# Altium PCB LPCB221R0.PcbDoc (part 1 of 2)
Units mm, origin at the board's own origin, x right, y up, seen from the top; angles counter-clockwise.
Board outline 145 x 164.7 mm, 2 copper layers (Top Layer, Bottom Layer); 95 components, 92 nets, 422 pads, 91 vias.
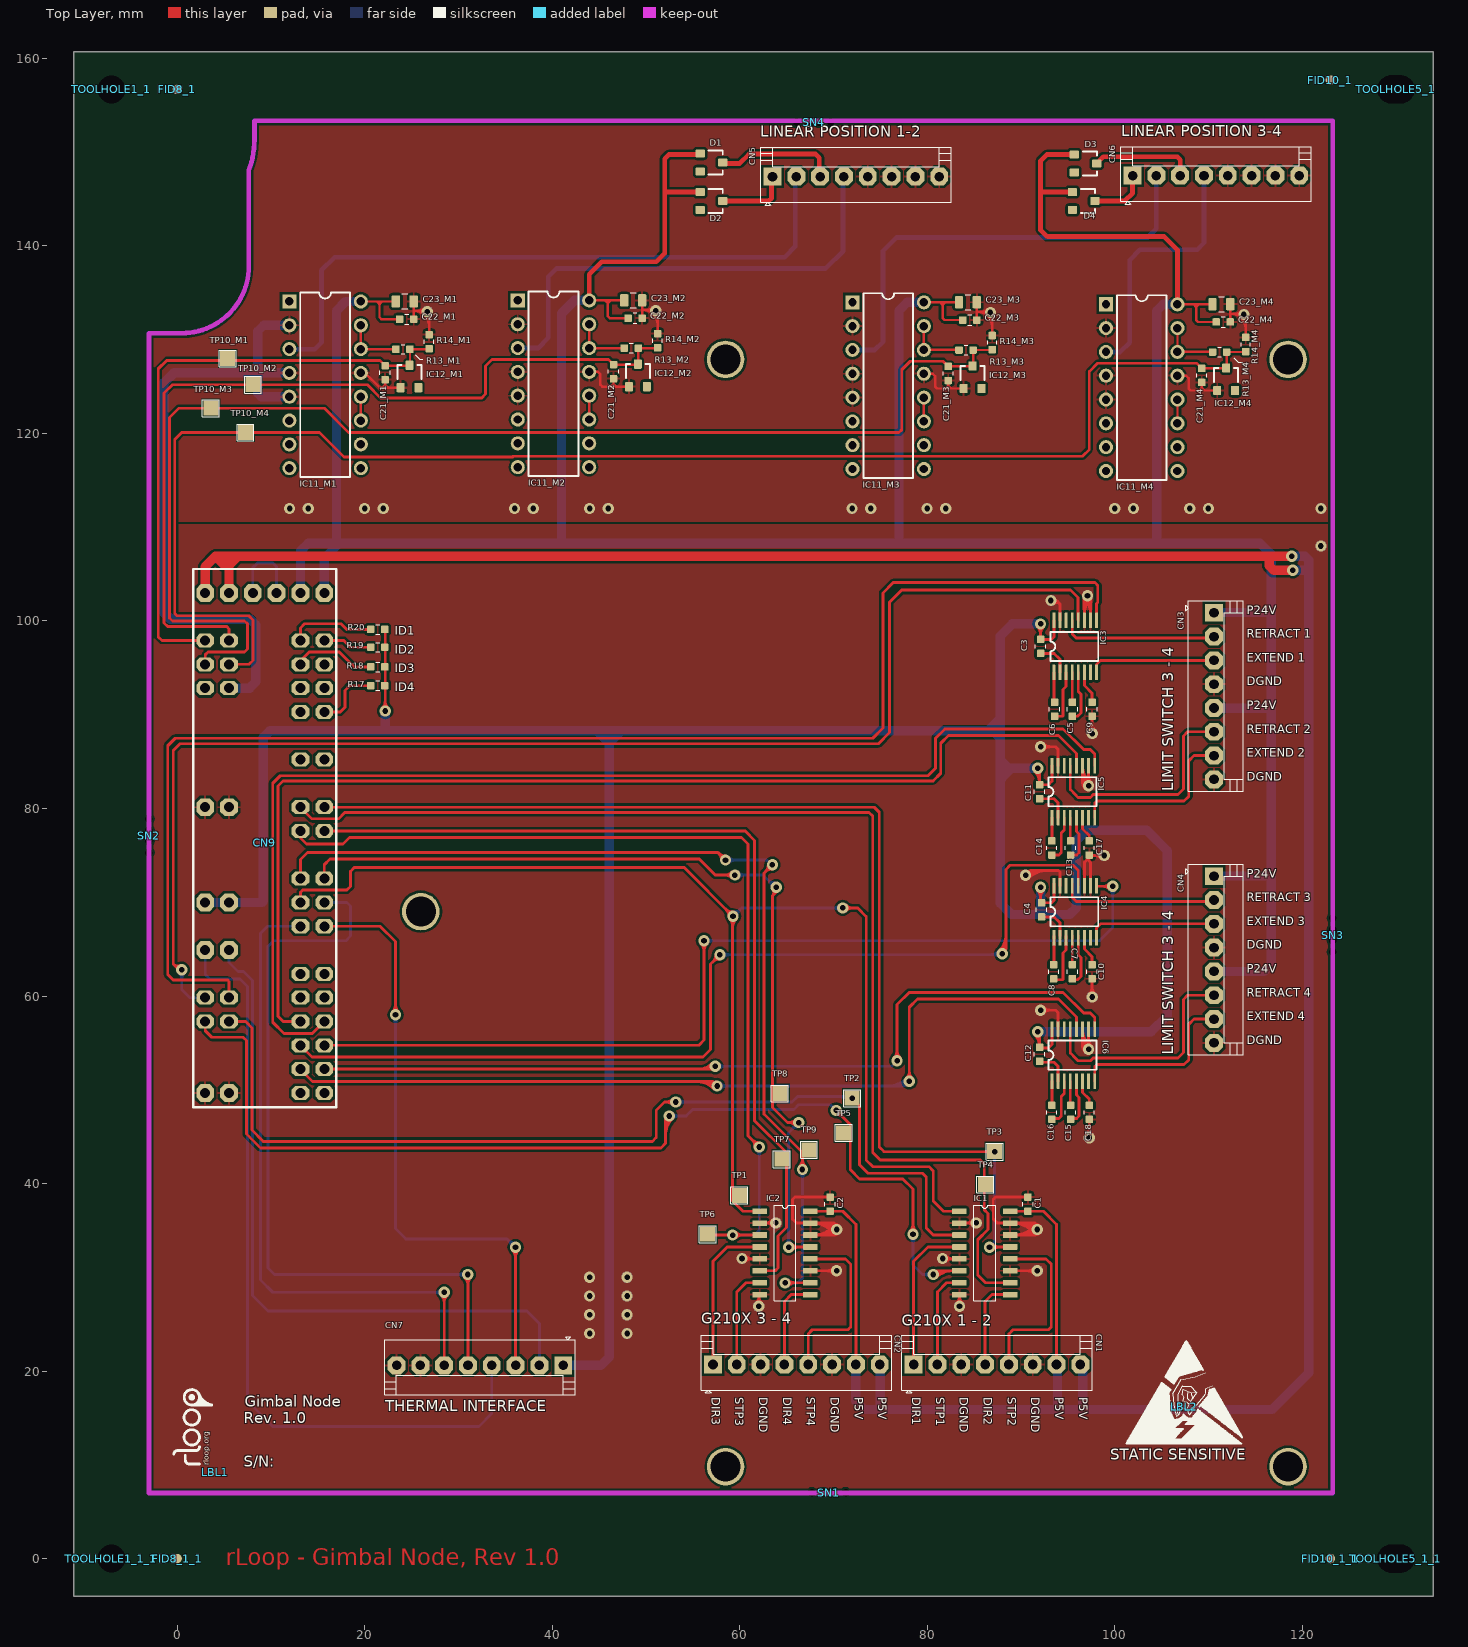
[diagram p0: Top Layer view]
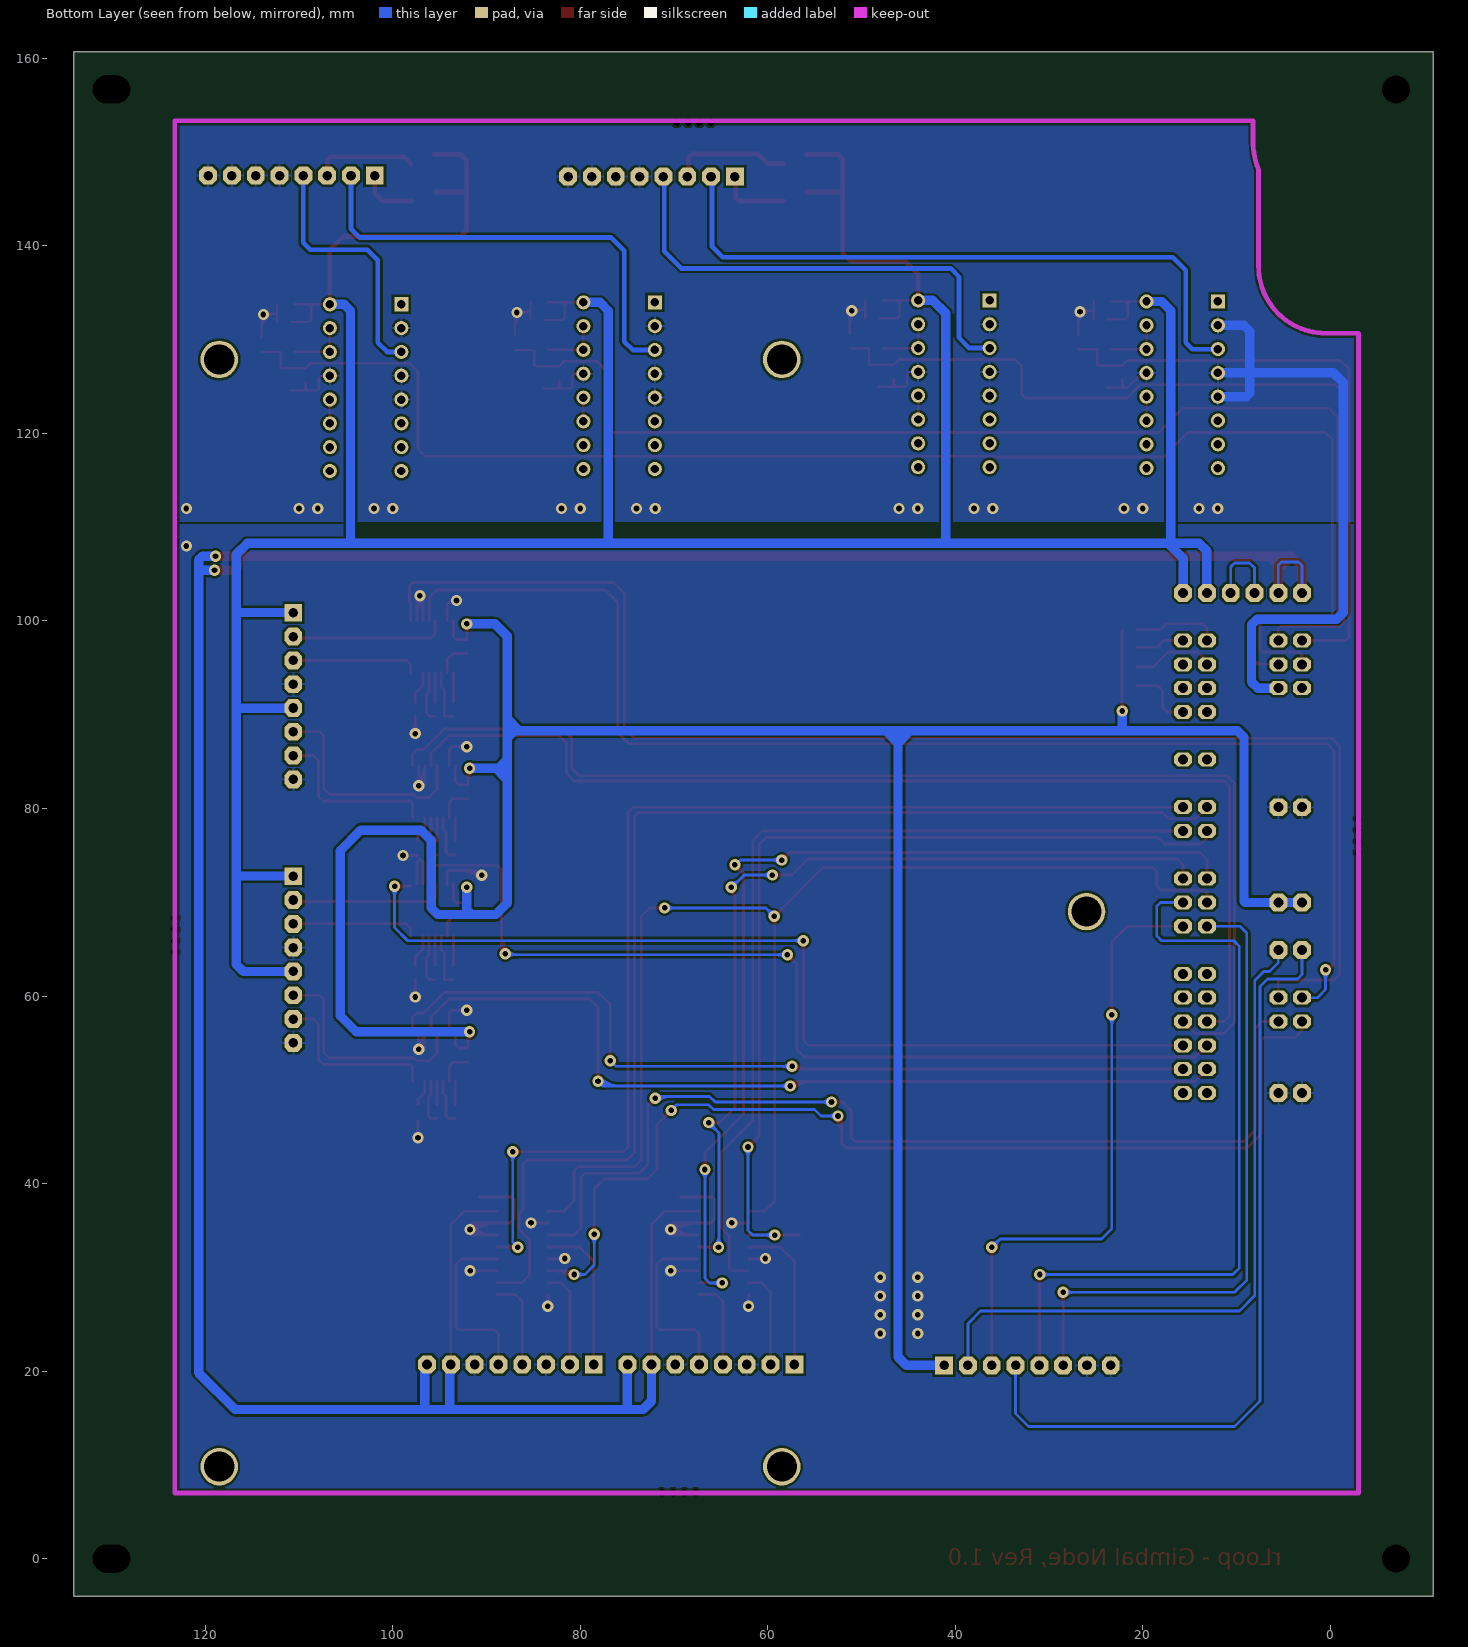
[diagram p1: Bottom Layer view, seen from below]

## Layer stack, top to bottom
Top Layer: signal copper 0.0356
Dielectric: core 0.32, FR-4, Dk 4.8
Bottom Layer: signal copper 0.0356

## Board outline
-11,-4 -11,160.695 134,160.695 134,-4

## Design rules (kind name [scope] priority, off if disabled: settings)
Clearance [All] p1: gap=0.254
HoleSize [All] p1: absolutevalues=TRUE maxlimit=5 minlimit=0.025 maxpercent=80.000 minpercent=20.000
MinimumSolderMaskSliver [All] p1: minsoldermaskwidth=0.01
PolygonConnect [isVia] p1: connectstyle=Direct reliefconductorwidth=0.254 reliefentries=4 polygonreliefangle="90 Angle" airgapwidth=0.254
PolygonConnect PolygonConnect_1 [All] p2: connectstyle=Relief reliefconductorwidth=0.254 reliefentries=4 polygonreliefangle="90 Angle" airgapwidth=0.254
RoomDefinition "LPCB221 - OVERVIEW" [InComponentClass('LPCB221 - OVERVIEW')] p1: confinementstyle=ConfineIn formatcopy=TRUE lockcomponents=FALSE outline -79.611,-127.179 -28.811,-127.179 -28.811,-101.779 -79.611,-101.779
RoomDefinition "U_LPCB221 - CORE INTERFACE" [InComponentClass('U_LPCB221 - CORE INTERFACE')] p2: confinementstyle=ConfineIn formatcopy=TRUE lockcomponents=FALSE outline -79.611,-127.179 -28.811,-127.179 -28.811,-101.779 -79.611,-101.779
RoomDefinition M4 [InComponentClass('M4')] p3: confinementstyle=ConfineIn formatcopy=TRUE lockcomponents=FALSE outline 94.29,110.79 121.84,110.79 121.84,136.19 94.29,136.19
RoomDefinition M3 [InComponentClass('M3')] p4: confinementstyle=ConfineIn formatcopy=TRUE lockcomponents=FALSE outline 67.25,111 94.8,111 94.8,136.4 67.25,136.4
RoomDefinition M2 [InComponentClass('M2')] p5: confinementstyle=ConfineIn formatcopy=TRUE lockcomponents=FALSE outline 31.55,111.2 59.1,111.2 59.1,136.6 31.55,136.6
RoomDefinition M1 [InComponentClass('M1')] p6: confinementstyle=ConfineIn formatcopy=TRUE lockcomponents=FALSE outline 7.19,111.09 31.64,111.09 31.64,136.49 7.19,136.49
RoomDefinition "U_LPCB221 - LIMIT SWITCHES" [InComponentClass('U_LPCB221 - LIMIT SWITCHES')] p7: confinementstyle=ConfineIn formatcopy=TRUE lockcomponents=FALSE outline 87.1,43.69 117.9,43.69 117.9,104.79 87.1,104.79
RoomDefinition "U_LPCB221 - G210X INTERFACE" [InComponentClass('U_LPCB221 - G210X INTERFACE')] p8: confinementstyle=ConfineIn formatcopy=TRUE lockcomponents=FALSE outline 53.95,15.297 100.15,15.297 100.15,40.2 53.95,40.2
RoutingVias [All] p1: holewidth=0.6 width=1.2 viastyle="Through Hole" minholewidth=0.6 minwidth=1.2 maxholewidth=1.5 maxwidth=3
SilkToSilkClearance [All] p1 off: silktosilkclearance=0.01
SilkToSolderMaskClearance [IsPad] p1: minsilkscreentomaskgap=0.01 clearancetoexposedcopper=TRUE
SolderMaskExpansion [All] p1: expansion=0.102
Width [All] p1: maxlimit=1 minlimit=0.254 preferedwidth=0.3
24 further rules are at their usual default settings.

## Classes and differential pairs
component class "U_LPCB221 - CORE INTERFACE": CN7 CN9 R17 R18 R19 R20
component class "U_LPCB221 - LIMIT SWITCHES": C3 C4 C5 C6 C7 C8 C9 C10 C11 C12 C13 C14 C15 C16 C17 C18 CN3 CN4 IC3 IC4 IC5 IC6
component class "U_LPCB221 - G210X INTERFACE": C1 C2 CN1 CN2 IC1 IC2 TP1 TP2 TP3 TP4 TP5 TP6 TP7 TP8 TP9
component class "LPCB221 - OVERVIEW": LBL1 LBL2 SN1 SN2 SN3 SN4
component class M1: C21_M1 C22_M1 C23_M1 IC11_M1 IC12_M1 R13_M1 R14_M1 TP10_M1
component class M2: C21_M2 C22_M2 C23_M2 IC11_M2 IC12_M2 R13_M2 R14_M2 TP10_M2
component class M3: C21_M3 C22_M3 C23_M3 IC11_M3 IC12_M3 R13_M3 R14_M3 TP10_M3
component class M4: C21_M4 C22_M4 C23_M4 IC11_M4 IC12_M4 R13_M4 R14_M4 TP10_M4
net class MA420IN[1..4]: MA420IN1 MA420IN2 MA420IN3 MA420IN4
net class MLP_OUT[1..4]: MLP_OUT1 MLP_OUT2 MLP_OUT3 MLP_OUT4
channel class "LPCB221 - MLP CHANNEL": M1 M2 M3 M4

## Components (designator, comment, footprint, x,y, rotation, side; value= is the part's Value field where it differs from the comment)
C1 "100n / 50V / 10% / SMD 0603" LFP011__CC1608-0603-IPC7351_B 90.75,37.8 r90 top
C2 "100n / 50V / 10% / SMD 0603" LFP011__CC1608-0603-IPC7351_B 69.65,37.8 r90 top
C3 "100n / 50V / 10% / SMD 0603" LFP011__CC1608-0603-IPC7351_B 92.1,97.29 r270 top
C4 "100n / 50V / 10% / SMD 0603" LFP011__CC1608-0603-IPC7351_B 92.2,69.19 r270 top
C5 "100n / 50V / 10% / SMD 0603" LFP011__CC1608-0603-IPC7351_B 95.5,90.59 r270 top
C6 "100n / 50V / 10% / SMD 0603" LFP011__CC1608-0603-IPC7351_B 93.6,90.59 r270 top
C7 "100n / 50V / 10% / SMD 0603" LFP011__CC1608-0603-IPC7351_B 95.5,62.6 r270 top
C8 "100n / 50V / 10% / SMD 0603" LFP011__CC1608-0603-IPC7351_B 93.5,62.59 r270 top
C9 "100n / 50V / 10% / SMD 0603" LFP011__CC1608-0603-IPC7351_B 97.6,90.59 r270 top
C10 "100n / 50V / 10% / SMD 0603" LFP011__CC1608-0603-IPC7351_B 97.6,62.59 r270 top
C11 "100n / 50V / 10% / SMD 0603" LFP011__CC1608-0603-IPC7351_B 92,81.79 r270 top
C12 "100n / 50V / 10% / SMD 0603" LFP011__CC1608-0603-IPC7351_B 92,53.79 r270 top
C13 "100n / 50V / 10% / SMD 0603" LFP011__CC1608-0603-IPC7351_B 95.3,75.79 r270 top
C14 "100n / 50V / 10% / SMD 0603" LFP011__CC1608-0603-IPC7351_B 93.3,75.79 r270 top
C15 "100n / 50V / 10% / SMD 0603" LFP011__CC1608-0603-IPC7351_B 95.3,47.59 r270 top
C16 "100n / 50V / 10% / SMD 0603" LFP011__CC1608-0603-IPC7351_B 93.3,47.59 r270 top
C17 "100n / 50V / 10% / SMD 0603" LFP011__CC1608-0603-IPC7351_B 97.3,75.79 r270 top
C18 "100n / 50V / 10% / SMD 0603" LFP011__CC1608-0603-IPC7351_B 97.3,47.59 r270 top
C21_M1 "10pF / 50V / 5% / SMD 0603" LFP011__CC1608-0603-IPC7351_B 22.19,126.49 r270 top (schematic designator C21)
C21_M2 "10pF / 50V / 5% / SMD 0603" LFP011__CC1608-0603-IPC7351_B 46.55,126.6 r270 top (schematic designator C21)
C21_M3 "10pF / 50V / 5% / SMD 0603" LFP011__CC1608-0603-IPC7351_B 82.25,126.4 r270 top (schematic designator C21)
C21_M4 "10pF / 50V / 5% / SMD 0603" LFP011__CC1608-0603-IPC7351_B 109.29,126.19 r270 top (schematic designator C21)
C22_M1 "100n / 50V / 10% / SMD 0603" LFP011__CC1608-0603-IPC7351_B 24.49,132.19 r0 top (schematic designator C22)
C22_M2 "100n / 50V / 10% / SMD 0603" LFP011__CC1608-0603-IPC7351_B 48.85,132.3 r0 top (schematic designator C22)
C22_M3 "100n / 50V / 10% / SMD 0603" LFP011__CC1608-0603-IPC7351_B 84.55,132.1 r0 top (schematic designator C22)
C22_M4 "100n / 50V / 10% / SMD 0603" LFP011__CC1608-0603-IPC7351_B 111.59,131.89 r0 top (schematic designator C22)
C23_M1 "1uF / 50V / 10% / SMD 0805" LFP010__CC2012-0805-IPC7351_B 24.29,134.09 r0 top (schematic designator C23)
C23_M2 "1uF / 50V / 10% / SMD 0805" LFP010__CC2012-0805-IPC7351_B 48.65,134.2 r0 top (schematic designator C23)
C23_M3 "1uF / 50V / 10% / SMD 0805" LFP010__CC2012-0805-IPC7351_B 84.35,134 r0 top (schematic designator C23)
C23_M4 "1uF / 50V / 10% / SMD 0805" LFP010__CC2012-0805-IPC7351_B 111.39,133.79 r0 top (schematic designator C23)
CN1 "640456-8" 640456-8 87.45,20.7 r0 top
CN2 "640456-8" 640456-8 66.05,20.7 r0 top
CN3 "640456-8" 640456-8 110.6,91.99 r270 top
CN4 "640456-8" 640456-8 110.6,63.89 r270 top
CN5 "640456-8" 640456-8 72.4,147.4 r0 top
CN6 "640456-8" 640456-8 110.8,147.5 r0 top
CN7 "640456-8" 640456-8 32.3,20.6 r180 top locked
CN9 "RLOOP_NODE_CORE" RLOOP_NODE_CORE 3,103 r270 top locked
D1 "BAS16" LFP021__SOT23 57,148.9 r270 top
D2 "BAS16" LFP021__SOT23 57,144.8 r270 top
D3 "BAS16" LFP021__SOT23 96.9,148.8 r270 top
D4 "BAS16" LFP021__SOT23 96.7,144.8 r270 top
FID8_1 "FIDUCIAL" FIDTOP 0,156.695 r0 top
FID8_1_1 "FIDUCIAL" FIDTOP 0,0 r0 top
FID10_1 "FIDUCIAL" FIDTOP 123,157.695 r0 top
FID10_1_1 "FIDUCIAL" FIDTOP 123,0 r0 top
IC1 "SN74HCT157DR" LFP079__SOP16 86.15,32.6 r270 top
IC2 "SN74HCT157DR" LFP079__SOP16 64.85,32.6 r270 top
IC3 "MAX3232CPWR" LFP049__TSSOP-16 95.8,97.29 r0 top
IC4 "MAX3232CPWR" LFP049__TSSOP-16 95.8,68.99 r0 top
IC5 "MAX3232CPWR" LFP049__TSSOP-16 95.6,81.79 r0 top
IC6 "MAX3232CPWR" LFP049__TSSOP-16 95.6,53.69 r0 top
IC11_M1 "RCV420JP" DIP-P16/X1.5 15.79,125.19 r270 top (schematic designator IC11)
IC11_M2 "RCV420JP" DIP-P16/X1.5 40.15,125.3 r270 top (schematic designator IC11)
IC11_M3 "RCV420JP" DIP-P16/X1.5 75.85,125.1 r270 top (schematic designator IC11)
IC11_M4 "RCV420JP" DIP-P16/X1.5 102.89,124.89 r270 top (schematic designator IC11)
IC12_M1 "BZX84C3V6LT1G" LFP021__SOT23 24.79,126.09 r0 top (schematic designator IC12)
IC12_M2 "BZX84C3V6LT1G" LFP021__SOT23 49.15,126.2 r0 top (schematic designator IC12)
IC12_M3 "BZX84C3V6LT1G" LFP021__SOT23 84.85,126 r0 top (schematic designator IC12)
IC12_M4 "BZX84C3V6LT1G" LFP021__SOT23 111.89,125.79 r0 top (schematic designator IC12)
LBL1 "RLOOP_LOGO" RLOOP_LOGO 4.1,9.2 r90 top
LBL2 "STATIC LABEL" STATIC_LABEL 107.4,16.2 r0 top
R13_M1 "1.78K / 0.1W / 1% / 50V / SMD 0603" LFP020__CR1608-0603-IPC7351_B 24.09,128.99 r180 top (schematic designator R13)
R13_M2 "1.78K / 0.1W / 1% / 50V / SMD 0603" LFP020__CR1608-0603-IPC7351_B 48.45,129.1 r180 top (schematic designator R13)
R13_M3 "1.78K / 0.1W / 1% / 50V / SMD 0603" LFP020__CR1608-0603-IPC7351_B 84.15,128.9 r180 top (schematic designator R13)
R13_M4 "1.78K / 0.1W / 1% / 50V / SMD 0603" LFP020__CR1608-0603-IPC7351_B 111.19,128.69 r180 top (schematic designator R13)
R14_M1 "3.3K / 0.1W / 1% / SMD 0603" LFP020__CR1608-0603-IPC7351_B 26.89,129.79 r270 top (schematic designator R14)
R14_M2 "3.3K / 0.1W / 1% / SMD 0603" LFP020__CR1608-0603-IPC7351_B 51.25,129.9 r270 top (schematic designator R14)
R14_M3 "3.3K / 0.1W / 1% / SMD 0603" LFP020__CR1608-0603-IPC7351_B 86.95,129.7 r270 top (schematic designator R14)
R14_M4 "3.3K / 0.1W / 1% / SMD 0603" LFP020__CR1608-0603-IPC7351_B 113.99,129.49 r270 top (schematic designator R14)
R17 "0R / 0.1W / SMD 0603" LFP020__CR1608-0603-IPC7351_B 21.4,93.1 r0 top
R18 "0R / 0.1W / SMD 0603" LFP020__CR1608-0603-IPC7351_B 21.4,95.1 r0 top
R19 "0R / 0.1W / SMD 0603" LFP020__CR1608-0603-IPC7351_B 21.4,97.2 r0 top
R20 "0R / 0.1W / SMD 0603" LFP020__CR1608-0603-IPC7351_B 21.4,99.1 r0 top
SN1 "PCB_SNAPOUT" SNAPOUT_NEW 71.3,7 r180 top
SN2 "PCB_SNAPOUT" SNAPOUT_NEW -3,75.3 r90 top
SN3 "PCB_SNAPOUT" SNAPOUT_NEW 123.252,64.7 r90 top
SN4 "PCB_SNAPOUT" SNAPOUT_NEW 69.7,153.2 r180 top
TOOLHOLE1_1 "Comment" TOOL-1#1 -7,156.695 r0 top
TOOLHOLE1_1_1 "Comment" TOOL-1#1 -7,0 r0 top
TOOLHOLE5_1 "Comment" TOOL-1#2 130,156.695 r0 top
TOOLHOLE5_1_1 "Comment" TOOL-1#2 130,0 r0 top
TP1 "SMD_TP" SMD-TP 59.97,38.742 r0 top
TP2 "SMD_TP" SMD-TP 72,49.1 r0 top
TP3 "SMD_TP" SMD-TP 87.2,43.4 r0 top
TP4 "SMD_TP" SMD-TP 86.2,39.9 r0 top
TP5 "SMD_TP" SMD-TP 71.1,45.4 r0 top
TP6 "SMD_TP" SMD-TP 56.6,34.6 r0 top
TP7 "SMD_TP" SMD-TP 64.5,42.6 r0 top
TP8 "SMD_TP" SMD-TP 64.3,49.6 r0 top
TP9 "SMD_TP" SMD-TP 67.4,43.6 r0 top
TP10_M1 "SMD_TP" SMD-TP 5.4,128 r90 top (schematic designator TP10)
TP10_M2 "SMD_TP" SMD-TP 8.1,125.2 r90 top (schematic designator TP10)
TP10_M3 "SMD_TP" SMD-TP 3.6,122.7 r90 top (schematic designator TP10)
TP10_M4 "SMD_TP" SMD-TP 7.3,120.1 r90 top (schematic designator TP10)

## Footprints (in the part's own frame and the unit in brackets; to place one, negate y for a bottom-side part, rotate by r counter-clockwise, add the part's x,y. Pads: shape width x height; smd on the part's side, far side on the other; paste and mask are expansions set on the pad)
640456-8 [mm] "Connector, Male Header, 8 Way"
  rect 1.905x1.905 hole 1.02: 1(-8.89,0)
  oct 1.905x1.905 hole 1.02: 2(-6.35,0) 3(-3.81,0) 4(-1.27,0) 5(1.27,0) 6(3.81,0) 7(6.35,0) 8(8.89,0)
  silkscreen extent -10.15,-3.04 10.17,3.1
DIP-P16/X1.5 [mm] "16Pin DIP"
  rect 1.5x1.5 hole 0.9: 1(-8.89,-3.81)
  round 1.5 hole 0.9: 2(-6.35,-3.81) 3(-3.81,-3.81) 4(-1.27,-3.81) 5(1.27,-3.81) 6(3.81,-3.81) 7(6.35,-3.81) 8(8.89,-3.81) 9(8.89,3.81) 10(6.35,3.81) 11(3.81,3.81) 12(1.27,3.81) 13(-1.27,3.81) 14(-3.81,3.81) 15(-6.35,3.81) 16(-8.89,3.81)
  silkscreen extent -9.85,-2.65 9.85,2.65
FIDTOP [mil]
  round 40 smd mask+39.37: 1(0,0)
LFP010__CC2012-0805-IPC7351_B [mm]
  rrect25% 0.9x1.3 smd paste-0.01: 1(-0.95,0) 2(0.95,0)
  silkscreen extent -0.3,-0.8 0.3,0.8
LFP011__CC1608-0603-IPC7351_B [mm]
  rrect25% 0.8x0.8 smd: 1(-0.75,0) 2(0.75,0)
  silkscreen extent -0.2,-0.55 0.2,0.55
LFP020__CR1608-0603-IPC7351_B [mm]
  rrect25% 0.8x0.8 smd: 1(-0.75,0) 2(0.75,0)
  silkscreen extent -0.2,-0.5 0.2,0.5
LFP021__SOT23 [mm] "SOT-23; 3 Leads; Body 3.0 x 2.5 mm, inc. leads (LxW max)"
  rrect25% 0.85x1 smd paste-0.05: 1(-0.95,-1.2) 2(0.95,-1.2) 3(0,1.2)
  silkscreen extent -1.27,-0.3 1.28,1.2
LFP049__TSSOP-16 [mm] "Copied from 984E-02"
  rrect25% 0.3x1.65 smd paste-0.03: 1(-2.275,-2.775) 2(-1.625,-2.775) 3(-0.975,-2.775) 4(-0.325,-2.775) 5(0.325,-2.775) 6(0.975,-2.775) 7(1.625,-2.775) 8(2.275,-2.775) 9(2.275,2.775) 10(1.625,2.775) 11(0.975,2.775) 12(0.325,2.775) 13(-0.325,2.775) 14(-0.975,2.775) 15(-1.625,2.775) 16(-2.275,2.775)
  silkscreen extent -2.65,-1.55 2.45,1.55
LFP079__SOP16 [mm]
  rrect10% 0.6x1.55 smd paste-0.05: 1(-4.445,-2.7) 2(-3.175,-2.7) 3(-1.905,-2.7) 4(-0.635,-2.7) 5(0.635,-2.7) 6(1.905,-2.7) 7(3.175,-2.7) 8(4.445,-2.7) 9(4.445,2.7) 10(3.175,2.7) 11(1.905,2.7) 12(0.635,2.7) 13(-0.635,2.7) 14(-1.905,2.7) 15(-3.175,2.7) 16(-4.445,2.7)
  silkscreen extent -5.08,-1.16 5.08,1.16
RLOOP_LOGO [mm]
  silkscreen extent 0.89,0.39 8.82,4.45
RLOOP_NODE_CORE [mil]
  oct 59.06x75 hole 42: A10(200,0) A11(200,100) A12(300,0) A13(300,100) A14(400,0) AGND(400,100) ID1(200,400) ID2(200,500) ID3(300,400) ID4(500,500) ID5(500,400) ID6(400,500) ID7(400,400) ID8(300,500) SCL(700,500) SDA(700,400) T0(900,400) T1(900,500) T2(1000,400) T5(1000,500) T6(1200,400) T7(1200,500) T8(1300,400) T9(1300,500) T10(1400,400) T11(1400,500) T14(1600,400) T15(1600,500) T16(1700,400) T17(1700,500) T20(1800,400) T21(1800,500) T22(1900,400) T23(1900,500) T24(2000,400) T25(2000,500) T26(2100,400) T27(2100,500) T28(1700,0) T31(1700,100) T32(1800,0) T33(1800,100)
  oct 75x75 hole 42: D3V31(1300,0) D3V32(1300,100) D12V1(0,300) D12V2(0,200) GND1(2100,100) GND2(2100,0) GND3(900,100) GND4(900,0) P5V1(0,0) P5V2(0,100) P24V1(0,400) P24V2(0,500) T12(1500,0) T13(1500,100)
  silkscreen extent -100,-50 2160,550
SMD-TP [mm]
  rect 1.6x1.6 smd paste-2: 1(0,0)
  silkscreen extent -0.9,-0.9 0.9,0.9
SNAPOUT_NEW [mm]
  round 0.4 hole 0.8 unplated: 0(0,0) 0(1.2,0) 0(2.4,0) 0(3.6,0)
STATIC_LABEL [mm]
  silkscreen extent -6.16,-3.95 6.18,7.02
TOOL-1#1 [mm]
  round 2.54 hole 3 unplated: TOOL(0,0)
TOOL-1#2 [mm]
  round 0.076 hole 3 slot 4 at 0 deg unplated: TOOL1(0,0)

## Part data
C1 C2 C3 C4 C5 C6 C7 C8 C9 C10 C11 C12 C13 C14 C15 C16 C17 C18 C22_M1 C22_M2 C22_M3 C22_M4: "Capacitor, Ceramic Chip, 100nF (0.1uF), 50V, 5%, SMD 0603 [LCA016]"
C21_M1 C21_M2 C21_M3 C21_M4: "Capacitor, Ceramic Chip, 10pF, 50V, 5%, SMD 0603 [LCA019]"
C23_M1 C23_M2 C23_M3 C23_M4: "Capacitor, Ceramic Chip, 1uF, 50V, SMD 0805 [LCA098]"
CN1 CN2 CN3 CN4 CN5 CN6 CN7: "Connector, Male Header, 8 Way"
CN9: "rLoop Node Core Connector"
D1 D2 D3 D4: "Diode, Small Signal, 0.2A, 85V, SMD SOT-23 [LIC006]"
IC1 IC2: "IC, Multiplexer Select 2-1 [LIC525]"
IC3 IC4 IC5 IC6: "IC, RS232 Line Driver, 3.3V, SMD TSSOP16 [LIC165]"
IC11_M1 IC11_M2 IC11_M3 IC11_M4: "IC, 4-20mA Interface, DIP16 [LIC546]"
IC12_M1 IC12_M2 IC12_M3 IC12_M4: "Diode, Zener, 3.6V, 0.225W, SMD [LIC083]"
R13_M1 R13_M2 R13_M3 R13_M4: "Resistor, Ceramic Chip, 1.78K, 0.1W, 1%, SMD 0603 [LRE167]"
R14_M1 R14_M2 R14_M3 R14_M4: "Resistor, Ceramic Chip, 3.3K0, 0.1W, 1%, SMD 0603 [LRE140]"
R17 R18 R19 R20: "Resistor, Ceramic Chip, 0R, 0.1W, SMD 0603 [LRE026]"
TP1 TP2 TP3 TP4 TP5 TP6 TP7 TP8 TP9 TP10_M1 TP10_M2 TP10_M3 TP10_M4: "SMD Test Point"

## Free pads (board coordinates)
  round 4 hole 3.2: B(26,69) B(58.5,9.8) B(58.5,127.9) B(118.5,9.8) B(118.5,127.9)

## Via types
v1: diameter 1.2, hole 0.6, Top Layer to Bottom Layer, 91 vias

## Nets (pads, with @x,y where several pads share a name; then routed paths per layer and width w, separated by ;. In a path a pad name is that pad's centre, name@x,y a point inside that pad or via, vN(x,y) a via of type N, cw(c..) or ccw(c..) an arc to the next point about the centre after c; other vN are vias at no path point)
AGND: C21_M1.2 C21_M2.2 C21_M3.2 C21_M4.2 C22_M1.2 C22_M2.2 C22_M3.2 C22_M4.2 C23_M1.2 C23_M2.2 C23_M3.2 C23_M4.2 CN5.5 CN5.6 CN5.7 CN5.8 CN6.5 CN6.6 CN6.7 CN6.8 CN9.AGND IC11_M1.2 IC11_M1.4 IC11_M1.5 IC11_M1.13 IC11_M2.2 IC11_M2.4 IC11_M2.5 IC11_M2.13 IC11_M3.2 IC11_M3.4 IC11_M3.5 IC11_M3.13 IC11_M4.2 IC11_M4.4 IC11_M4.5 IC11_M4.13 IC12_M1.1 IC12_M2.1 IC12_M3.1 IC12_M4.1 R14_M1.1 R14_M2.1 R14_M3.1 R14_M4.1 | length 144.7
  Top Layer w0.254: IC11_M1.13@19.6,126.46 20.04,126.46 21.61,124.89 21.89,124.89 ; C21_M1.2@22.19,125.74 22.19,125.19 ; IC12_M1.1@23.84,124.89 22.49,124.89 ; C22_M1.2@25.24,132.19 25.24,133.09 ; C23_M1.2@25.24,134.09 25.24,133.09 ; 25.307,133.09 cw(c25.307,131.607) 26.356,132.656 cw(c25.065,131.365) 26.89,131.365 ; 25.79,133.09 ccw(c25.79,133.891) v1@26.356,133.324 ; 25.92,133.09 cw(c25.92,132.22) 26.535,132.835 cw(c25.678,131.978) 26.89,131.978 ; R14_M1.1@26.89,130.54 26.89,132.79 26.59,133.09 25.24,133.09 ; 26.89,132.331 cw(c27.349,132.331) v1@27.024,132.656 ; IC11_M2.13@43.96,126.57 44.88,126.57 45.15,126.3 45.15,125.2 45.35,125 46.25,125 ; C21_M2.2@46.55,125.85 46.55,125.3 ; IC12_M2.1@48.2,125 46.85,125 ; C22_M2.2@49.6,132.3 49.6,133.2 ; C23_M2.2@49.6,134.2 49.6,133.2 ; 49.667,133.2 cw(c49.667,131.717) 50.716,132.766 cw(c49.425,131.475) 51.25,131.475 ; 50.15,133.2 ccw(c50.15,134) v1@50.716,133.434 ; 50.28,133.2 cw(c50.28,132.33) 50.895,132.945 cw(c50.038,132.088) 51.25,132.088 ; R14_M2.1@51.25,130.65 51.25,132.9 50.95,133.2 49.6,133.2 ; 51.25,132.441 cw(c51.709,132.441) v1@51.384,132.766 ; IC11_M3.13@79.66,126.37 80.58,126.37 80.85,126.1 80.85,125 81.05,124.8 81.95,124.8 ; C21_M3.2@82.25,125.65 82.25,125.1 ; IC12_M3.1@83.9,124.8 82.55,124.8 ; C22_M3.2@85.3,132.1 85.3,133 ; C23_M3.2@85.3,134 85.3,133 ; 85.367,133 cw(c85.367,131.517) 86.416,132.566 cw(c85.125,131.275) 86.95,131.275 ; 85.85,133 ccw(c85.85,133.8) v1@86.416,133.234 ; 85.98,133 cw(c85.98,132.13) 86.595,132.745 cw(c85.738,131.888) 86.95,131.888 ; R14_M3.1@86.95,130.45 86.95,132.7 86.65,133 85.3,133 ; 86.95,132.241 cw(c87.409,132.241) v1@87.084,132.566 ; IC11_M4.13@106.7,126.16 107.62,126.16 107.89,125.89 107.89,124.79 108.09,124.59 108.99,124.59 ; C21_M4.2@109.29,125.44 109.29,124.89 ; IC12_M4.1@110.94,124.59 109.59,124.59 ; C22_M4.2@112.34,131.89 112.34,132.79 ; C23_M4.2@112.34,133.79 112.34,132.79 ; 112.407,132.79 cw(c112.407,131.307) 113.456,132.356 cw(c112.165,131.065) 113.99,131.065 ; 112.89,132.79 ccw(c112.89,133.59) v1@113.456,133.024 ; 113.02,132.79 cw(c113.02,131.92) 113.635,132.535 cw(c112.778,131.678) 113.99,131.678 ; R14_M4.1@113.99,130.24 113.99,132.49 113.69,132.79 112.34,132.79 ; 113.99,132.031 cw(c114.449,132.031) v1@114.124,132.356 ; 21.89,124.89 22.19,125.19 ; 21.89,124.89 22.29,124.89 ; 22.19,125.19 22.19,124.99 22.29,124.89 ; 22.19,125.19 22.49,124.89 ; 22.29,124.89 22.49,124.89 ; 46.25,125 46.65,125 ; 46.25,125 46.55,125.3 ; 46.55,125.3 46.85,125 ; 46.55,125.3 46.55,125.1 46.65,125 ; 46.65,125 46.85,125 ; 81.95,124.8 82.25,125.1 ; 81.95,124.8 82.35,124.8 ; 82.25,125.1 82.25,124.9 82.35,124.8 ; 82.25,125.1 82.55,124.8 ; 82.35,124.8 82.55,124.8 ; 108.99,124.59 109.39,124.59 ; 108.99,124.59 109.29,124.89 ; 109.29,124.89 109.59,124.59 ; 109.29,124.89 109.29,124.69 109.39,124.59 ; 109.39,124.59 109.59,124.59
  Bottom Layer w1: CN9.AGND@5.54,92.84 7.74,92.84 8.4,93.5 8.4,99.6 7.8,100.2 -0.7,100.2 -1.4,100.9 -1.4,125.4 -0.34,126.46 8.6,126.46 ; IC11_M1.5@11.98,123.92 8.98,123.92 8.6,124.3 8.6,126.46 ; IC11_M1.4@11.98,126.46 8.6,126.46 ; IC11_M1.2@11.98,131.54 9.24,131.54 8.6,130.9 8.6,126.46
  other v1: 12,112 14,112 20,112 22,112 36,112 38,112 44,112 46,112 72,112 74,112 80,112 82,112 100,112 102,112 108,112 110,112 122,112 113.79,132.69 86.75,132.9 26.69,132.99 51.05,133.1
D3V3A: C3.1 C4.1 C11.1 C12.1 CN7.1 CN9.D3V31 CN9.D3V32 IC3.16 IC4.16 IC5.16 IC6.16 R17.2 R18.2 R19.2 R20.2 | length 324.6
  Top Layer w0.3: v1@21.882,90.718 ccw(c21.114,91.486) 22.2,91.486 ccw(c23.286,91.486) v1@22.518,90.718 ; R20.2@22.15,99.1 22.2,99.05 v1(22.2,90.4) ; v1@91.482,55.872 cw(c90.231,54.621) C12.1@92,54.621 ; v1@91.482,83.972 cw(c90.231,82.721) C11.1@92,82.721 ; v1@91.694,56.084 cw(c90.955,55.345) 92,55.345 ; v1@91.694,84.184 cw(c90.955,83.445) 92,83.445 ; v1@91.782,71.272 cw(c91.014,70.504) 92.1,70.504 cw(c93.186,70.504) v1@92.418,71.272 ; v1@91.782,99.372 cw(c91.014,98.604) 92.1,98.604 cw(c93.186,98.604) v1@92.418,99.372 ; v1(91.8,56.19) 92,55.99 C12.1@92,54.54 92,54.44 92.95,54.44 93.325,54.815 IC6.16@93.325,56.465 ; v1(91.8,84.29) 92,84.09 C11.1@92,82.54 92.95,82.54 93.325,82.915 IC5.16@93.325,84.565 ; 92,55.586 cw(c92.404,55.586) v1@92.118,55.872 ; 92,83.686 cw(c92.404,83.686) v1@92.118,83.972 ; v1(92.1,71.59) 92.1,69.94 93.25,69.94 93.525,70.215 IC4.16@93.525,71.965 ; v1(92.1,99.69) C3.1@92.1,98.04 93.25,98.04 93.525,98.315 IC3.16@93.525,100.065
  Bottom Layer w1: CN9.D3V31@3,69.98 CN9.D3V32@5.54,69.98 9.08,69.98 9.2,70.1 9.2,87.6 9.9,88.3 22.2,88.3 ; v1(22.2,90.4) 22.2,88.3 ; CN7.1@41.19,20.6 45.2,20.6 46.1,21.5 46.1,87 ; 87.6,88.4 87.5,88.3 87,88.3 ; v1(91.8,56.19) 103.89,56.19 105.6,57.9 105.6,75.5 103.4,77.7 97,77.7 95.9,76.6 95.9,69.4 95.2,68.7 91.6,68.7 ; v1(91.8,84.29) 89,84.29 ; v1(92.1,71.59) 92.1,69.2 91.6,68.7 ; v1(92.1,99.69) 89.09,99.69 87.8,98.4 87.8,89.6 ; 22.2,88.3 44.8,88.3 ; 44.8,88.3 46.1,87 ; 44.8,88.3 46.1,88.3 ; 46.1,87 47.4,88.3 ; 46.1,87 46.1,88.3 ; 46.1,88.3 47.4,88.3 ; 47.4,88.3 86.5,88.3 ; 86.5,88.3 87.8,89.6 ; 86.5,88.3 87,88.3 ; 87,88.3 87.8,87.5 ; 87.8,83.3 88.01,83.3 89,84.29 ; 87.8,83.3 87.8,69.9 89,68.7 91.6,68.7 ; 87.8,83.3 87.8,84.3 ; 87.8,84.3 87.81,84.29 88.71,84.29 ; 87.8,84.3 87.8,85.2 ; 87.8,85.2 88.71,84.29 ; 87.8,85.2 87.8,87.5 ; 87.8,87.5 87.8,89.6 ; 88.71,84.29 89,84.29
D12VA: CN9.D12V1 CN9.D12V2 | length 8.4
  Bottom Layer w0.3: CN9.D12V2@8.08,103 8.08,105.68 8.6,106.2 10.2,106.2 10.62,105.78 CN9.D12V1@10.62,103
DGND: C1.2 C2.2 C9.2 C10.2 C17.2 C18.2 CN1.3 CN1.6 CN2.3 CN2.6 CN3.4 CN3.8 CN4.4 CN4.8 CN7.7 CN7.8 CN9.GND1 CN9.GND2 CN9.GND3 CN9.GND4 IC1.2 IC1.5 IC1.8 IC1.11 IC1.14 IC1.15 IC2.2 IC2.5 IC2.8 IC2.11 IC2.14 IC2.15 IC3.10 IC3.11 IC3.15 IC4.10 IC4.11 IC4.15 IC5.10 IC5.11 IC5.15 IC6.10 IC6.11 IC6.15 | length 167.7
  Top Layer w0.3: v1(60.25,32) 60.285,31.965 IC2.5@62.05,31.965 ; v1@60.568,31.682 cw(c61.252,30.998) 61.252,31.965 ; v1@60.568,32.318 ccw(c61.421,33.171) IC2.5@61.421,31.965 ; v1@61.732,27.218 ccw(c60.964,27.986) 62.05,27.986 ccw(c63.136,27.986) v1@62.368,27.218 ; v1(62.05,26.9) IC2.8@62.05,28.155 ; IC2.2@62.05,35.775 63.825,35.775 v1(63.85,35.8) ; IC2.2@62.703,35.775 ccw(c62.703,36.947) v1@63.532,36.118 ; IC2.2@62.824,35.775 cw(c62.824,34.774) v1@63.532,35.482 ; IC2.11@67.45,30.695 v1(70.345,30.695) v1@70.35,30.7 ; IC2.14@67.45,34.505 70.155,34.505 70.35,34.7 70.35,35.5 70.075,35.775 67.45,35.775 66.075,35.775 65.65,36.2 65.65,38.3 65.9,38.55 C2.2@69.35,38.55 ; IC2.15@67.634,35.775 cw(c67.634,32.384) v1@70.032,34.782 ; IC2.14@67.827,34.505 ccw(c67.827,37.623) v1@70.032,35.418 ; 68.358,35.775 cw(c68.358,33.108) v1@70.244,34.994 ; 68.551,34.505 ccw(c68.551,36.899) v1@70.244,35.206 ; 69.083,35.775 cw(c69.083,33.833) v1@70.456,35.206 ; 69.276,34.505 ccw(c69.276,36.174) v1@70.456,34.994 ; 69.807,35.775 cw(c69.807,34.557) v1@70.668,35.418 ; 70,34.505 ccw(c70,35.45) v1@70.668,34.782 ; v1@70.027,30.377 ccw(c69.259,29.609) 69.259,30.695 ccw(c69.259,31.781) v1@70.027,31.013 ; v1(81.65,32) 81.685,31.965 IC1.5@83.45,31.965 ; v1@81.968,31.682 cw(c82.652,30.998) 82.652,31.965 ; v1@81.968,32.318 ccw(c82.821,33.171) IC1.5@82.821,31.965 ; v1@83.132,27.218 ccw(c82.364,27.986) 83.45,27.986 ccw(c84.536,27.986) v1@83.768,27.218 ; v1(83.45,26.9) IC1.8@83.45,28.155 ; IC1.2@83.45,35.775 85.225,35.775 v1(85.25,35.8) ; IC1.2@84.103,35.775 ccw(c84.103,36.947) v1@84.932,36.118 ; IC1.2@84.224,35.775 cw(c84.224,34.774) v1@84.932,35.482 ; IC1.11@88.85,30.695 v1(91.745,30.695) v1@91.75,30.7 ; IC1.14@88.85,34.505 91.555,34.505 91.75,34.7 91.75,35.5 91.475,35.775 IC1.15@88.85,35.775 87.475,35.775 87.05,36.2 87.05,38.3 87.3,38.55 C1.2@90.75,38.55 ; IC1.15@89.034,35.775 cw(c89.034,32.384) v1@91.432,34.782 ; IC1.14@89.227,34.505 ccw(c89.227,37.623) v1@91.432,35.418 ; 89.758,35.775 cw(c89.758,33.108) v1@91.644,34.994 ; 89.951,34.505 ccw(c89.951,36.899) v1@91.644,35.206 ; v1@90.394,72.996 cw(c91.345,72.045) 91.345,73.39 ; 90.483,35.775 cw(c90.483,33.833) v1@91.856,35.206 ; v1(90.5,72.89) 91,73.39 ; v1@90.606,72.784 cw(c92.069,71.321) 92.069,73.39 ; v1@90.654,73.313 ccw(c90.766,73.624) 91,73.39 ; 90.676,34.505 ccw(c90.676,36.174) v1@91.856,34.994 ; v1@90.818,72.572 cw(c92.794,70.596) 92.794,73.39 ; v1@90.923,73.044 cw(c91.234,73.156) 91,73.39 ; 91.207,35.775 cw(c91.207,34.557) v1@92.068,35.418 ; 91.4,34.505 ccw(c91.4,35.45) v1@92.068,34.782 ; v1@91.427,30.377 ccw(c90.659,29.609) 90.659,30.695 ccw(c90.659,31.781) v1@91.427,31.013 ; v1(92.1,58.49) 93.7,58.49 93.975,58.215 IC6.15@93.975,56.465 ; v1(92.1,86.59) 93.7,86.59 93.975,86.315 IC5.15@93.975,84.565 ; v1@92.418,58.172 cw(c93.186,57.404) 93.186,58.49 cw(c93.186,59.576) v1@92.418,58.808 ; v1@92.418,86.272 cw(c93.186,85.504) 93.186,86.59 cw(c93.186,87.676) v1@92.418,86.908 ; v1(93.2,102.19) 93.8,102.19 94.175,101.815 ; v1@93.296,102.075 cw(c93.604,101.708) 93.943,102.047 ; v1@93.489,101.845 cw(c93.816,101.456) 94.175,101.815 ; IC4.15@94.175,71.765 94.175,73.215 94,73.39 91,73.39 ; IC3.15@94.175,100.065 94.175,101.815 ; 96.575,54.706 ccw(c97.507,54.706) v1@96.962,53.95 ; 96.575,55.292 ccw(c97.93,55.292) v1@97.137,54.193 ; IC6.11@96.575,55.879 ccw(c98.353,55.879) v1@97.313,54.437 ; 96.575,82.806 ccw(c97.507,82.806) v1@96.962,82.05 ; 96.575,83.392 ccw(c97.93,83.392) v1@97.137,82.293 ; IC5.11@96.575,83.979 ccw(c98.353,83.979) v1@97.313,82.537 ; IC4.11@96.775,71.965 96.775,74.265 97.1,74.59 97.425,74.265 IC4.10@97.425,71.965 ; IC3.11@96.775,100.065 96.775,102.365 v1(97.1,102.69) 97.425,102.365 IC3.10@97.425,100.065 ; IC3.11@96.775,100.819 cw(c98.971,100.819) v1@97.418,102.372 ; 96.775,101.543 cw(c98.247,101.543) v1@97.206,102.584 ; v1@96.782,102.372 cw(c95.229,100.819) IC3.10@97.425,100.819 ; v1@96.907,54.633 ccw(c96.139,55.401) 97.225,55.401 ccw(c98.311,55.401) v1@97.543,54.633 ; v1@96.907,82.733 ccw(c96.139,83.501) 97.225,83.501 ccw(c98.311,83.501) v1@97.543,82.733 ; v1@96.982,45.208 ccw(c96.214,45.976) 97.3,45.976 ccw(c98.386,45.976) v1@97.618,45.208 ; v1@96.994,102.584 cw(c95.953,101.543) 97.425,101.543 ; IC6.10@97.225,56.465 v1(97.225,54.315) 97.2,54.29 96.9,54.29 96.575,54.615 IC6.11@96.575,56.465 ccw(c98.776,56.465) v1@97.488,54.68 ; IC5.10@97.225,84.565 v1(97.225,82.415) 97.2,82.39 96.9,82.39 96.575,82.715 IC5.11@96.575,84.565 ccw(c98.776,84.565) v1@97.488,82.78 ; v1@97.282,60.208 ccw(c96.514,60.976) 97.6,60.976 ccw(c98.686,60.976) v1@97.918,60.208 ; v1@97.282,88.308 ccw(c96.514,89.076) 97.6,89.076 ccw(c98.686,89.076) v1@97.918,88.308 ; v1(97.3,44.89) C18.2@97.3,46.74 ; C17.2@97.3,75.04 97.35,74.99 v1(98.9,74.99) ; v1(97.6,59.89) C10.2@97.6,61.74 ; v1(97.6,87.99) C9.2@97.6,89.84 ; v1@98.582,74.672 ccw(c97.814,73.904) 97.814,74.99 ccw(c97.814,76.076) v1@98.582,75.308
  other v1: 44,24 48,24 44,26 48,26 44,28 48,28 44,30 48,30 70.35,35.1 91.75,35.1 122,108
EXPAND_MOSI: CN7.3 CN9.T11 | length 71.9
  Top Layer w0.3: CN9.T11@15.7,67.44 21.66,67.44 23.3,65.8 v1(23.3,58) ; v1@22.982,58.318 ccw(c22.214,59.086) 23.3,59.086 ccw(c24.386,59.086) v1@23.618,58.318 ; v1@35.782,32.882 cw(c34.989,32.089) 36.11,32.089 ; v1(36.1,33.2) 36.11,33.19 CN7.3@36.11,20.6 ; 36.11,32.138 cw(c37.162,32.138) v1@36.418,32.882
  Bottom Layer w0.3: v1@22.982,57.682 cw(c22.214,56.914) 23.3,56.914 cw(c24.386,56.914) v1@23.618,57.682 ; v1(23.3,58) 23.3,35.2 24.4,34.1 35.2,34.1 v1(36.1,33.2) ; v1@35.65,33.2 ccw(c34.564,33.2) 35.332,33.968 ccw(c36.1,34.736) v1@36.1,33.65
EXPAND_NCS: CN7.6 CN9.T10 | length 72.9
  Top Layer w0.3: v1@28.182,28.082 cw(c27.438,27.338) 28.49,27.338 ; CN7.6@28.49,20.6 28.49,28.39 v1(28.5,28.4) ; 28.49,27.289 cw(c29.611,27.289) v1@28.818,28.082
  Bottom Layer w0.3: CN9.T10@13.16,67.44 9.64,67.44 8.9,66.7 8.9,29.7 10.2,28.4 v1(28.5,28.4) ; v1@28.182,28.082 ccw(c27.414,27.314) 27.414,28.4 ccw(c27.414,29.486) v1@28.182,28.718
EXPAND_NRESET: CN7.5 CN9.T9 | length 84.4
  Top Layer w0.3: v1@30.682,29.982 cw(c29.841,29.141) 31.03,29.141 ; v1(31,30.3) 31.03,30.27 CN7.5@31.03,20.6 ; 31.03,29.286 cw(c32.014,29.286) v1@31.318,29.982
  Bottom Layer w0.3: CN9.T9@15.7,69.98 18.12,69.98 18.5,69.6 18.5,66.4 18,65.9 10.3,65.9 9.7,65.3 9.7,31 10.4,30.3 v1(31,30.3) ; v1@30.682,29.982 ccw(c29.914,29.214) 29.914,30.3 ccw(c29.914,31.386) v1@30.682,30.618
EXPAND_SCK: CN7.2 CN9.T13 | length 74.5
  Bottom Layer w0.3: CN9.T13@5.54,64.9 5.54,63.56 6.5,62.6 7.1,62.6 8.054,61.646 8.054,28.046 9.7,26.4 37.3,26.4 38.65,25.05 CN7.2@38.65,20.6
EXPAND_SOMI: CN7.4 CN9.T12 | length 84.7
  Bottom Layer w0.3: CN9.T12@3,64.9 3,62.3 3.5,61.8 6.7,61.8 7.5,61 7.5,16.8 10.2,14.1 32.2,14.1 33.57,15.47 CN7.4@33.57,20.6
GIM1_EXTEND: CN3.3 IC3.8 | length 13.6
  Top Layer w0.3: IC3.8@98.075,94.515 98.075,95.365 98.51,95.8 CN3.3@110.6,95.8
GIM1_RETRACT: CN3.2 IC3.13 | length 16.8
  Top Layer w0.3: IC3.13@95.475,100.065 95.475,98.615 95.9,98.19 110.45,98.19 CN3.2@110.6,98.34
GIM2_EXTEND: CN3.7 IC5.8 | length 18.6
  Top Layer w0.3: IC5.8@97.875,79.015 97.875,80.565 98.1,80.79 107.4,80.79 107.9,81.29 107.9,85.09 108.45,85.64 CN3.7@110.6,85.64
GIM2_RETRACT: CN3.6 IC5.13 | length 24.9
  Top Layer w0.3: IC5.13@95.275,84.565 95.275,82.015 95.8,81.49 96.1,81.19 97.42,81.19 97.72,81.49 ; 98.2,81.49 97.72,81.49 ; CN3.6@110.6,88.18 107.79,88.18 107.346,87.736 107.346,82.09 106.746,81.49 97.72,81.49
GIM3_EXTEND: CN4.3 IC4.8 | length 13.6
  Top Layer w0.3: IC4.8@98.075,66.415 98.075,67.265 98.51,67.7 CN4.3@110.6,67.7
GIM3_RETRACT: CN4.2 IC4.13 | length 16.8
  Top Layer w0.3: IC4.13@95.475,71.965 95.475,70.515 95.9,70.09 110.45,70.09 CN4.2@110.6,70.24
GIM4_EXTEND: CN4.7 IC6.8 | length 18.6
  Top Layer w0.3: IC6.8@97.875,50.915 97.875,52.465 98.1,52.69 107.4,52.69 107.9,53.19 107.9,56.99 108.45,57.54 CN4.7@110.6,57.54
GIM4_RETRACT: CN4.6 IC6.13 | length 24.9
  Top Layer w0.3: IC6.13@95.275,56.465 95.275,53.915 95.8,53.39 96.1,53.09 97.42,53.09 97.72,53.39 ; 98.2,53.39 97.72,53.39 ; CN4.6@110.6,60.08 107.79,60.08 107.346,59.636 107.346,53.99 106.746,53.39 97.72,53.39